# Altium PCB Main.PcbDoc
Units mm, origin at the board's own origin, x right, y up, seen from the top; angles counter-clockwise.
Board outline 152.4 x 101.6 mm, 2 copper layers (Top Layer, Bottom Layer); 41 components, 29 nets, 129 pads, 0 vias.
Unrouted connection lines stored in the file: 79.
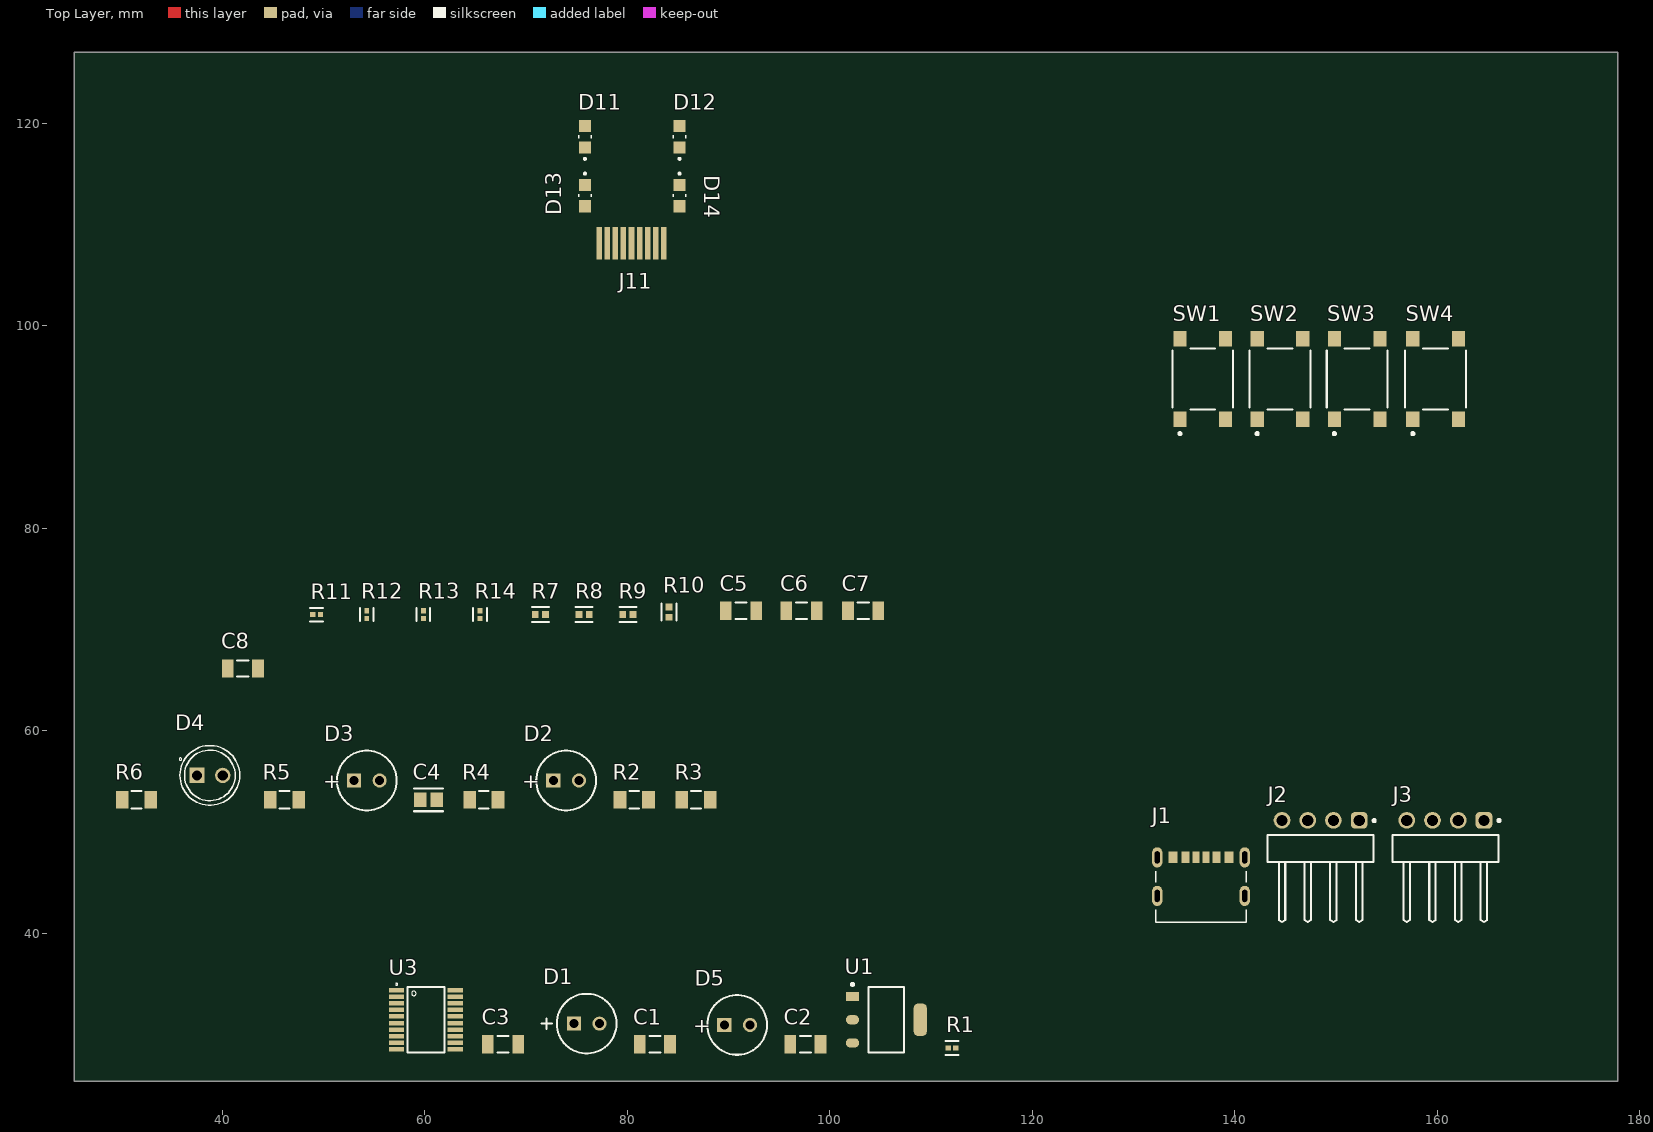
[diagram p0: Top Layer view]
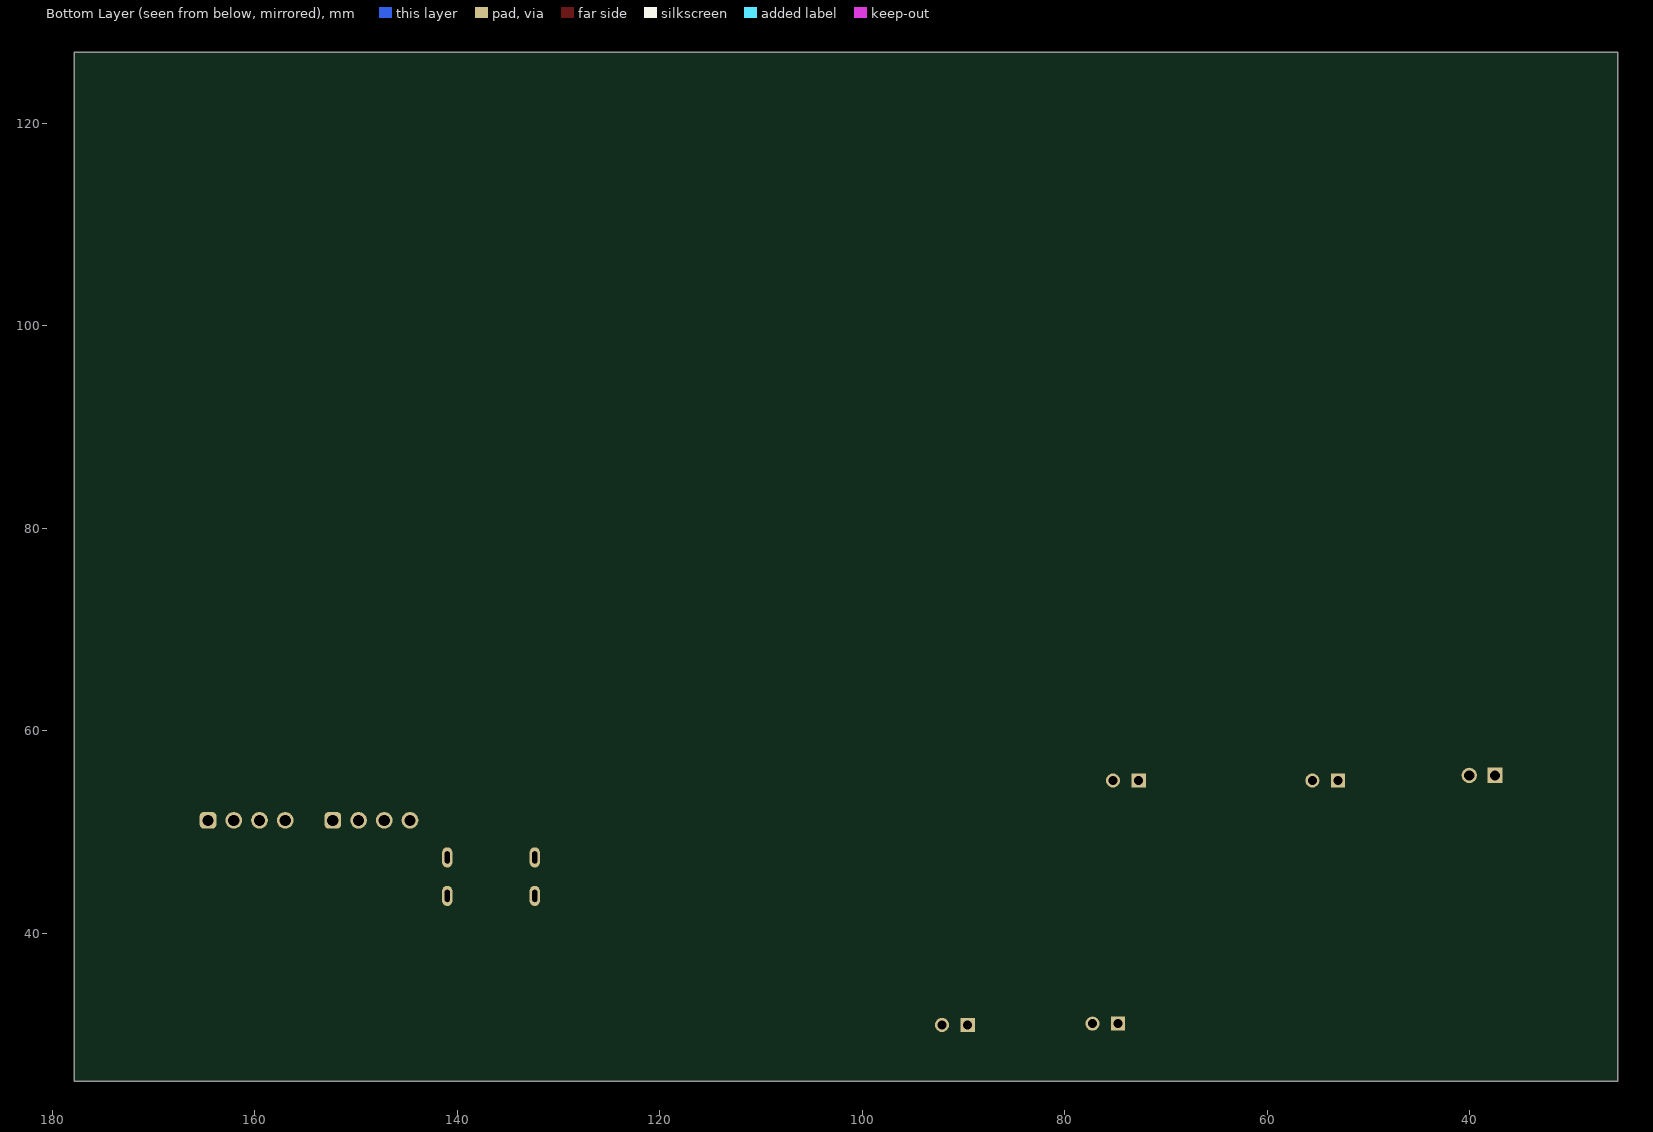
[diagram p1: Bottom Layer view, seen from below]

## Layer stack, top to bottom
Top Solder: solder mask 0.0102, Solder Resist, Dk 3.5
Top Layer: signal copper 0.0356
Dielectric 1: dielectric 0.32, FR-4, Dk 4.8
Bottom Layer: signal copper 0.0356
Bottom Solder: solder mask 0.0102, Solder Resist, Dk 3.5

## Board outline
25.4,25.4 177.8,25.4 177.8,127 25.4,127

## Design rules (kind name [scope] priority, off if disabled: settings)
Clearance [All] p1: gap=0.254 ignorepadtopadclearanceinfootprint=FALSE
PolygonConnect [All] p1: connectstyle=Relief reliefconductorwidth=0.254 reliefentries=4 polygonreliefangle="90 Angle" airgapwidth=0.254
RoomDefinition U2 [InComponentClass('U2')] p1: confinementstyle=ConfineIn formatcopy=TRUE lockcomponents=FALSE outline 73.99,105.986 87.071,105.986 87.071,120.98 73.99,120.98
RoutingVias [All] p1: holewidth=0.711 width=1.27 viastyle="Through Hole" minholewidth=0.711 minwidth=1.27 maxholewidth=0.711 maxwidth=1.27
SolderMaskExpansion [All] p1: expansion=0.102 istentingtop=FALSE
SupplyNets "Schematic Supply Nets_2" [InNet('GND')] p1: voltage=0.000
SupplyNets "Schematic Supply Nets_1" [InNet('+3.3')] p2: voltage=0.000
SupplyNets "Schematic Supply Nets" [InNet('+5')] p3: voltage=0.000
Width [All] p1: maxlimit=1 minlimit=0.254 preferedwidth=0.5
30 further rules are at their usual default settings.

## Classes and differential pairs
component class U2: D11 D12 "D13 " D14 J11
component class Main: C1 C2 C3 C4 C5 C6 C7 C8 D1 D2 D3 D4 D5 J1 J2 J3 R1 R2 R3 R4 R5 R6 R7 R8 R9 R10 R11 R12 R13 R14 SW1 SW2 SW3 SW4 U1 U3

## Components (designator, comment, footprint, x,y, rotation, side; value= is the part's Value field where it differs from the comment)
C1 "CAPACITOR_1206ZC104JAT2A" CAPC1206(3216)100_N 82.728,29.058 r0 top value=100nF
C2 "CAPACITOR_1206ZC104JAT2A" CAPC1206(3216)100_N 97.587,29.058 r0 top value=100nF
C3 "CAPACITOR_1206ZC104JAT2A" CAPC1206(3216)100_N 67.742,29.058 r0 top value=100nF
C4 "CL21F105ZAFNNNF" FP-CL21-IPC_B 60.376,53.188 r0 top value=1µF
C5 "CAPACITOR_1206ZC104JAT2A" CAPC1206(3216)100_N 91.237,71.857 r0 top value=100nF
C6 "CAPACITOR_1206ZC104JAT2A" CAPC1206(3216)100_N 97.206,71.857 r0 top value=100nF
C7 "CAPACITOR_1206ZC104JAT2A" CAPC1206(3216)100_N 103.302,71.857 r0 top value=100nF
C8 "CAPACITOR_1206ZC104JAT2A" CAPC1206(3216)100_N 42.037,66.167 r0 top value=100nF
D1 "Green" KING-WP7113SGD_V 75.997,31.09 r0 top
D2 "Red" KING-WP7113SRDD_V 73.965,55.093 r0 top
D3 "Yellow" KING-WP7113SYD_V 54.28,55.093 r0 top
D4 "Orange" LED_WP7113SEC 38.786,55.601 r0 top
D5 "PWR" KING-WP7113SRDD_V 90.856,30.963 r0 top
D11 "LED" LED_LTW-170TK 75.819,118.66 r90 top
D12 "LED" LED_LTW-170TK 85.166,118.66 r90 top
D13 "LED" LED_LTW-170TK 75.819,112.844 r270 top
D14 "LED" LED_LTW-170TK 85.166,112.844 r270 top
J1 "USB" CUI_UJC-HP-3-SMT-TR 136.652,47.498 r0 top
J2 "Program" 61300411021 148.463,48.387 r0 top
J3 "UART" 61300411021 160.782,48.387 r0 top
J11 "Module_for_Nokia_LCD_5110" PCBComponent_1 80.616,108.345 r180 top
R1 "RESISTOR__RC1005F102CS" FP-RC1005-IPC_C 112.065,28.677 r0 top value=1k
R2 "MCR18EZPF3300" FP-MCR18-IPC_B 80.696,53.188 r0 top value=330
R3 "MCR18EZPF3300" FP-MCR18-IPC_B 86.792,53.188 r0 top value=330
R4 "MCR18EZPF3300" FP-MCR18-IPC_B 65.837,53.188 r0 top value=330
R5 "MCR18EZPF3300" FP-MCR18-IPC_B 46.152,53.188 r0 top value=330
R6 "MCR18EZPF3300" FP-MCR18-IPC_B 31.547,53.188 r0 top value=330
R7 "TFCR0402-16W-C-1002BT" FP-TFCR0402-IPC_A 71.425,71.476 r0 top value=10k
R8 "TFCR0402-16W-C-1002BT" FP-TFCR0402-IPC_A 75.743,71.476 r0 top value=10k
R9 "TFCR0402-16W-C-1002BT" FP-TFCR0402-IPC_A 80.061,71.476 r0 top value=10k
R10 "TFCR0402-16W-C-1002BT" FP-TFCR0402-IPC_A 84.125,71.73 r90 top value=10k
R11 "RESISTOR__RC1005F102CS" FP-RC1005-IPC_C 49.327,71.476 r0 top value=1k
R12 "RESISTOR__RC1005F102CS" FP-RC1005-IPC_C 54.28,71.476 r90 top value=1k
R13 "RESISTOR__RC1005F102CS" FP-RC1005-IPC_C 59.868,71.476 r90 top value=1k
R14 "RESISTOR__RC1005F102CS" FP-RC1005-IPC_C 65.456,71.476 r90 top value=1k
SW1 "BUTTON1" FP-PTS645SM43SMTR92LFS-MFG 136.83,94.742 r90 top
SW2 "BUTTON2" FP-PTS645SM43SMTR92LFS-MFG 144.45,94.742 r90 top
SW3 "BUTTON3" FP-PTS645SM43SMTR92LFS-MFG 152.07,94.742 r90 top
SW4 "BUTTON4" FP-PTS645SM43SMTR92LFS-MFG 159.817,94.742 r90 top
U1 "AMS1117-3.3" FP-AMS1117-IPC_B 105.588,31.471 r0 top
U3 "STM8S103F3P6" SOP65P640X120-20N 60.122,31.471 r0 top

## Footprints (in the part's own frame and the unit in brackets; to place one, negate y for a bottom-side part, rotate by r counter-clockwise, add the part's x,y. Pads: shape width x height; smd on the part's side, far side on the other; paste and mask are expansions set on the pad)
61300411021 [mm] "Pin Header, pitch 2.54 mm, THT, Angled, single row, 4p"
  rrect50% 1.65x1.65 hole 1.1: 1(3.81,2.77)
  round 1.65 hole 1.1: 2(1.27,2.77) 3(-1.27,2.77) 4(-3.81,2.77)
  silkscreen extent -5.23,-7.27 5.42,2.87, body extent -5.08,-7.27 5.08,3.09, height 2.58
CAPC1206(3216)100_N [mm] "Chip Capacitor, Body 3.2x1.6mm, Height 1mm, IPC Medium Density"
  rect 1.15x1.8 smd: 1(-1.5,0) 2(1.5,0)
  silkscreen extent -0.55,-0.8 0.55,0.8, body extent -1.7,-0.9 1.7,0.9, height 1
CUI_UJC-HP-3-SMT-TR [mm]
  rect 0.7x1.15 smd: A5(-0.5,0.005) B5(0.5,0.005)
  rect 0.8x1.15 smd: A9(1.52,0.005) B9(-1.52,0.005)
  rect 0.9x1.15 smd: A12(2.75,0.005) B12(-2.75,0.005)
  oval 1x2 hole 0.5 slot 1.2 at 90 deg: S1(-4.32,0) S2(4.32,0) S3(-4.32,-3.8) S4(4.32,-3.8)
  silkscreen extent -4.47,-6.4 4.47,-1.35, body extent -4.47,-4.28 4.47,2.62, height 1.93
FP-AMS1117-IPC_B [mm]
  rect 1.304x0.912 smd paste+0 mask+0: 1(-3.345,2.29)
  rrect100% 1.304x0.912 smd paste+0 mask+0: 2(-3.345,0) 3(-3.345,-2.29)
  rrect70% 1.304x3.222 smd paste+0 mask+0: 4(3.345,0)
  silkscreen extent -3.47,-3.25 1.75,3.62, body extent -4.25,-3.5 4.25,3.5, height 0.25
FP-CL21-IPC_B [mm]
  rect 1.255x1.456 smd paste+0 mask+0: 1(-0.826,0) 2(0.826,0)
  silkscreen extent -1.45,-1.13 1.45,1.13, body extent -1.7,-0.98 1.7,0.98, height 0.25
FP-MCR18-IPC_B [mm]
  rect 1.256x1.758 smd paste+0 mask+0: 1(-1.401,0) 2(1.401,0)
  silkscreen extent -0.47,-0.88 0.47,0.88, body extent -2.28,-1.13 2.28,1.13, height 0.25
FP-PTS645SM43SMTR92LFS-MFG [mm]
  rect 1.55x1.3 smd paste+0 mask+0: 1(-3.975,2.25) 2(3.975,2.25) 3(-3.975,-2.25) 4(3.975,-2.25)
  silkscreen extent -5.52,-3 3,3, body extent -4.85,-3.1 4.85,3.1, height 0.25
FP-RC1005-IPC_C [mm]
  rect 0.515x0.472 smd paste+0 mask+0: 1(-0.379,0) 2(0.379,0)
  silkscreen extent -0.64,-0.67 0.64,0.67, body extent -0.74,-0.38 0.74,0.38, height 0.25
FP-TFCR0402-IPC_A [mm]
  rect 0.665x0.672 smd paste+0 mask+0: 1(-0.504,0) 2(0.504,0)
  silkscreen extent -0.84,-0.74 0.84,0.74, body extent -1.04,-0.54 1.04,0.54, height 0.25
KING-WP7113SGD_V [mm] "THD, 2-Leads, Dia 5.9mm, Body Length 8.6mm"
  rect 1.4x1.4 hole 0.889: 1(-1.27,0)
  round 1.4 hole 0.889: 2(1.27,0)
  silkscreen extent -4.47,-2.95 2.95,2.95, body extent -2.95,-2.95 2.5,2.95, height 15.5
KING-WP7113SRDD_V [mm] "THD, 2-Leads, Dia 5.9mm, Body Length 8.6mm"
  rect 1.4x1.4 hole 0.889: 1(-1.27,0)
  round 1.4 hole 0.889: 2(1.27,0)
  silkscreen extent -2.95,-2.95 2.95,2.95, body extent -2.95,-2.95 2.5,2.95, height 15.5
KING-WP7113SYD_V [mm] "THD, 2-Leads, Dia 5.9mm, Body Length 8.6mm"
  rect 1.4x1.4 hole 0.889: 1(-1.27,0)
  round 1.4 hole 0.889: 2(1.27,0)
  silkscreen extent -2.95,-2.95 2.95,2.95, body extent -2.95,-2.95 2.5,2.95, height 15.5
LED_LTW-170TK [mm]
  rect 1.2x1.2 smd: A(1.05,0) C(-1.05,0)
  silkscreen extent -2.27,-0.63 0.13,0.63
LED_WP7113SEC [mm]
  round 1.508 hole 1: A(1.27,0)
  rect 1.508x1.508 / inner round 1.508 / far side rect 1.508x1.508 hole 1: C(-1.27,0)
  silkscreen extent -3.03,-2.95 2.95,2.95, body extent -2.5,-2.95 2.95,2.95, height 9.6
PCBComponent_1 [mm]
  rect 0.55x3.2 smd: 1(-3,0.2) 2(-2.2,0.2) 3(-1.4,0.2) 4(-0.6,0.2) 5(0.2,0.2) 6(1,0.2) 7(1.8,0.2) 8(2.6,0.2) 9(3.4,0.2)
SOP65P640X120-20N [mm]
  rect 1.5x0.45 smd: 1(-2.9,2.925) 2(-2.9,2.275) 3(-2.9,1.625) 4(-2.9,0.975) 5(-2.9,0.325) 6(-2.9,-0.325) 7(-2.9,-0.975) 8(-2.9,-1.625) 9(-2.9,-2.275) 10(-2.9,-2.925) 11(2.9,-2.925) 12(2.9,-2.275) 13(2.9,-1.625) 14(2.9,-0.975) 15(2.9,-0.325) 16(2.9,0.325) 17(2.9,0.975) 18(2.9,1.625) 19(2.9,2.275) 20(2.9,2.925)
  silkscreen extent -3,-3.25 1.83,3.6, body extent -3.2,-3.25 3.2,3.25, height 0.53

## Part data
C1 C2 C3 C5 C6 C7 C8: library part CMP-001-00221-1, "Ceramic Capacitor, Multilayer, Ceramic, 10V, 5% +Tol, 5% -Tol, X7R, 15% TC, 0.1uF, Surface Mount, 1206", Capacitor Type=Ceramic, Case/Package=1206, Max Operating Temperature=125°C, Min Operating Temperature=-55°C, Package Shape=Rectangular, Package Style=SMTMeter, Rated DC Voltage (URdc)=10V, Temperature Characteristics Code=X7R, Tolerance  (fill in as +-)=5%, Dielectric Material=Ceramic, Height=0.94mm, JESD-609 Code=e3, Length=3.2mm, Mounting Technology="Surface Mount", Multilayer=Yes, Packaging="Tape and Reel", Pins=2, Reach SVHC Compliant=Yes, RoHS Compliant=Yes, Terminal Finish=Nickel, Termination=Wraparound, Tolerance (fill in as +-)=5%, Width=1.6mm
C4: library part CMP-001-00222-1, "Ceramic Capacitor, Multilayer, Ceramic, 25V, 80% +Tol, 20% -Tol, Y5V, -82/+22% TC, 1uF, Surface Mount, 0805", Capacitor Type=Ceramic, Case/Package=0805, Max Operating Temperature=85°C, Min Operating Temperature=-30°C, Package Shape=Rectangular, Package Style=SMTMeter, Rated DC Voltage (URdc)=25V, Temperature Characteristics Code=Y5V, Tolerance  (fill in as +-)=20%, Tolerance (fill in as +-)=80%, Dielectric Material=Ceramic, Height=1.35mm, JESD-609 Code=e3, Length=2mm, Mounting Technology="Surface Mount", Multilayer=Yes, Packaging="Tape and Reel", Pins=2, Reach SVHC Compliant=Yes, RoHS Compliant=Yes, Terminal Finish=Nickel, Termination=Wraparound, Width=1.25mm
D1: library part CMP-007-00010-2, "LED Green, 62.5 mW, 25 mA, -40 to 85 degC, 2-Pin THD, RoHS, Bulk", Case/Package=Radial, Forward Voltage=2.2V, Manufacturer=Kingbright, Package Description="2-Pin Through Hole Device, Dia 5.9 mm, Body Length 8.6 mm", Package Quantity=1000, Package Reference=WP7113SGD, Power=62.5mW, Colour=Green, Datasheet URL=http://www.kingbrightusa.com/images/catalog/SPEC/WP7113SGD.pdf, Datasheet Version="Rev. 6B, 01/2015", Illumination Colour=Green, Lens Style=Dome, Luminous Intensity=40mcd, Mounting Technology=TH, Nominal Vf=2.2V, Packaging=Bulk, RoHS Compliant=True, Viewing Angle=30degrees
D2: library part CMP-007-00033-2, "The Super Bright Red Source Color Device, 1.85 V, -40 to 85 degC, 2-Pin THD, RoHS, Tape and Reel", Case/Package=Radial, Forward Voltage=1.85V, Manufacturer=Kingbright, Package Description="2-Pin Through Hole Device, Dia 5.9 mm, Body Length 8.6 mm", Package Quantity=500, Package Reference=WP7113SRDD, Colour=Red, Datasheet URL=http://www.kingbrightusa.com/images/catalog/SPEC/WP7113SRD-D.pdf, Datasheet Version="Rev. 6A, 07/2016", Illumination Colour=Red, Lens Style=Diffused, Luminous Intensity=300mcd, Mounting Technology=TH, Nominal Vf=1.85V, Packaging=Bulk, RoHS Compliant=True, Viewing Angle=30degrees
D3: library part CMP-007-00034-2, "The Super Bright Yellow Source Color Device, 2 V, -40 to 85 degC, 2-Pin THD, RoHS, Tape and Reel", Case/Package=Radial, Forward Current=20mA, Forward Voltage=2V, Manufacturer=Kingbright, Package Description="2-Pin Through Hole Device, Dia 5.9 mm, Body Length 8.6 mm", Package Quantity=500, Package Reference=WP7113SYD, Colour=Yellow, Datasheet URL=http://www.kingbrightusa.com/images/catalog/SPEC/WP7113SYD.pdf, Datasheet Version="Rev. 7B, 01/2015", Illumination Colour=Yellow, Lens Style=Diffused, Luminous Intensity=600mcd, Mounting Technology=TH, Nominal Vf=2V, Packaging=Bulk, RoHS Compliant=True, Viewing Angle=30degrees
D4: library part CMP-004-00038-1, "LED Thru-Hole Orange T1-3/4 5mm Clear Lens 30mA 610nm 2500mcd Round", Case/Package="Radial Kingbright", Check_prices=https://www.snapeda.com/parts/WP7113SEC/Kingbright/view-part/?ref=eda, Component Type=Standard, Design Item ID=WP7113SEC, MF=Kingbright, MP=WP7113SEC, Pins=2, SnapEDA_Link=https://www.snapeda.com/parts/WP7113SEC/Kingbright/view-part/?ref=snap, Source=WP7113SEC.SchLib
D5: library part CMP-007-00033-2, "The Super Bright Red Source Color Device, 1.85 V, -40 to 85 degC, 2-Pin THD, RoHS, Tape and Reel", Case/Package=Radial, Colour=Red, Forward Voltage=1.85V, Manufacturer=Kingbright, Package Description="2-Pin Through Hole Device, Dia 5.9 mm, Body Length 8.6 mm", Package Quantity=500, Package Reference=WP7113SRDD, Datasheet URL=http://www.kingbrightusa.com/images/catalog/SPEC/WP7113SRD-D.pdf, Datasheet Version="Rev. 6A, 07/2016", Illumination Colour=Red, Lens Style=Diffused, Luminous Intensity=300mcd, Mounting Technology=TH, Nominal Vf=1.85V, Packaging=Bulk, RoHS Compliant=True, Viewing Angle=30degrees
D11 D12 D13 D14: library part CMP-004-00039-1, "White - LED Indication - Discrete 3.3V 0805 (2012 Metric)", Case/Package="0805 Lite-On", Check_prices=https://www.snapeda.com/parts/LTW-170TK/Lite-On/view-part/?ref=eda, Component Type=Standard, Design Item ID=LTW-170TK, MF="Lite-On Inc.", MP=LTW-170TK, Pins=2, SnapEDA_Link=https://www.snapeda.com/parts/LTW-170TK/Lite-On/view-part/?ref=snap, Source=LTW-170TK.SchLib
J1: library part CMP-074-000000-1, Package=None, Availability=Unavailable, Component Type=Standard, Design Item ID=UJC-HP-3-SMT-TR, MP=UJC-HP-3-SMT-TR, Pin Count=10, Price=None, Source=UJC-HP-3-SMT-TR.SchLib
J2 J3: library part CMP-043-000000-1, Color=Black, Contact Resistance=20m?, Current Rating=3A, Operating Supply Voltage=250V, Component Type=Standard, Connector Type="Male Pin", Contact Material=Copper, Contact Mating Length=5.9944mm, Contact Plating=Gold, Design Item ID=CMP-1502-01063-3, Gender=Male, Lead Pitch=2.54mm, Mount="Through Hole", NexarPartId=31153320, Number of Contacts=4, Number of Pins=4, Number of Positions=4, Number of Rows=1, Pin Count=4, Pitch=2.54mm, REACH SVHC=Unknown, RoHS=Compliant, Source="Components - 25.08.25 - 11.48.SchLib", Termination=Solder
R1: library part CMP-009-00419-1, "Fixed Resistor, Metal Glaze/thick Film, 0.06W, 1000ohm, 50V, 1% +/-Tol, 100ppm/Cel, Surface Mount, 0402", Case/Package=0402, Max Operating Temperature=125°C, Min Operating Temperature=-55°C, Package Height=0.35mm, Package Length=1mm, Package Shape=Rectangular, Package Width=0.5mm, Power=60mW, Resistor Type="FIXED RESISTOR", Temperature Coefficient (ppm/Cel)=100, Tolerance=1%, Working Voltage=50V, Construction=Chip, JESD-609 Code=e3, Mounting Technology="Surface Mount", Packaging="Tape and Reel", Pins=2, Reach SVHC Compliant=Yes, RoHS Compliant=Yes, Technology="METAL GLAZE/THICK FILM", Terminal Finish=Nickel
R2 R3 R4 R5 R6: library part CMP-009-00420-1, "Fixed Resistor, Metal Glaze/thick Film, 0.25W, 330ohm, 200V, 1% +/-Tol, 100ppm/Cel, Surface Mount, 1206", Case/Package=1206, Max Operating Temperature=155°C, Min Operating Temperature=-55°C, Package Height=0.55mm, Package Length=3.2mm, Package Shape=Rectangular, Package Width=1.6mm, Power=250mW, Rated Temperature=70°C, Resistor Type="FIXED RESISTOR", Temperature Coefficient (ppm/Cel)=100, Tolerance=1%, Working Voltage=200V, Construction=Rectangular, JESD-609 Code=e3, Mounting Technology="Surface Mount", Packaging="Tape and Reel", Pins=2, Reach SVHC Compliant=Yes, Reference Standard="TS 16949", RoHS Compliant=Yes, Technology="METAL GLAZE/THICK FILM", Terminal Finish=Nickel, Termination=Wraparound
R7 R8 R9 R10: library part CMP-009-00435-1, "Fixed Resistor, Thin Film, 0.063W, 10000ohm, 25V, 0.1% +/-Tol, 50ppm/Cel, Surface Mount, 0402", Case/Package=0402, Max Operating Temperature=155°C, Min Operating Temperature=-55°C, Power Dissipation=63mW, Temperature Coefficient=50ppm/°C, Tolerance=0.1%, Voltage Rating=25V, China RoHS=Compliant, Composition="Thin Film", Height=300µm, Lifecycle Status=Production, Mounting Technology="Surface Mount", Number of Terminals=2, Power Rating=63mW, REACH SVHC=Yes, RoHS=Compliant, Width=500µm, Working Voltage=25V
R11 R12 R13 R14: library part CMP-009-00449-1, "Res Thin Film 0603 47K Ohm 0.1% 0.063W(1/16W) ±25ppm/C Pad SMD T/R Medical", Case/Package=0402, Max Operating Temperature=125°C, Min Operating Temperature=-55°C, Package Height=0.35mm, Package Length=1mm, Package Shape=Rectangular, Package Width=0.5mm, Power=60mW, Resistor Type="FIXED RESISTOR", Temperature Coefficient (ppm/Cel)=100, Tolerance=1%, Working Voltage=50V, Construction=Chip, JESD-609 Code=e3, Mounting Technology="Surface Mount", Packaging="Tape and Reel", Pins=2, Reach SVHC Compliant=Yes, RoHS Compliant=Yes, Technology="METAL GLAZE/THICK FILM", Terminal Finish=Nickel
SW1 SW2 SW3 SW4: library part CMP-00012-1, "Keypad Switch, 1 Switches, SPST, Momentary-tactile, 0.05A, 12VDC, 1.57N, 4 PCB Hole Cnt, Solder Terminal, Surface Mount-straight", Contact Current(DC)-Max=50mA, Contact DC Max Rating R Load=0.05A@12VDC, Contact Resistance=0.1mR, Contact Voltage(DC)-Max=12V, Dielectric Withstand Volts=250VACV, Insulation Resistance=100GR, Max Operating Temperature=60°C, Min Operating Temperature=-20°C, Actuator Type=Pushbutton, Body Breadth=5.9944mm, Body Height=3.4544mm, Body Length or Diameter=5.9944mm, JESD-609 Code=e4, Mounting Technology="Surface Mount", PCB Hole Count=4, Reach SVHC Compliant=Yes, RoHS Compliant=Yes, Switch Action=MOMENTARY, Switch Function=SPST, Switch Type=Keypad, Terminal Finish=Silver, Terminal Length=0.138inch, Termination=Solder
U1: library part CMP-012-00000-1, "Fixed Positive LDO Regulator, 3.3V, 1.3V Dropout, PDSO3", Case/Package=SOP, Dropout Voltage1-Max=1.3V, Operating Temperature, TJ-Max=125°C, Operating Temperature, TJ-Min=-40°C, Output Current1-Max=1A, Output Voltage1-Max=3.399V, Output Voltage1-Min=3.201V, Output Voltage1-Nom=3.3V, Package Body Material=Plastic, Package Shape=Rectangular, Package Style="SMALL OUTLINEMeter", Channels=1, Height - Seated (Max)=1.8mm, JESD-30 Code=R-PDSO-G3, Length=6.505mm, Pins=3, Reach SVHC Compliant=Yes, Regulator Type="FIXED POSITIVE SINGLE OUTPUT LDO REGULATOR", RoHS Compliant=Yes, Surface Mount=Yes, Terminal Form="Gull Wing", Terminal Pitch=2.29mm, Terminal Position=DUAL, Width=3.505mm
U3: library part CMP-031-00014-1, "STM8 series Microcontroller IC 8-Bit 16MHz 8KB (8K x 8) FLASH 20-TSSOP", Case/Package="TSSOP-20 STMicroelectronics", Check_prices=https://www.snapeda.com/parts/STM8S103F3P6/STMicroelectronics/view-part/?ref=eda, Component Type=Standard, Design Item ID=STM8S103F3P6, MF=STMicroelectronics, MP=STM8S103F3P6, Pins=20, SnapEDA_Link=https://www.snapeda.com/parts/STM8S103F3P6/STMicroelectronics/view-part/?ref=snap, Source=STM8S103F3P6.SchLib

## Nets (pads, with @x,y where several pads share a name; then routed paths per layer and width w, separated by ;. In a path a pad name is that pad's centre, name@x,y a point inside that pad or via, vN(x,y) a via of type N, cw(c..) or ccw(c..) an arc to the next point about the centre after c; other vN are vias at no path point)
+3.3: C2.2 C3.1 J2.1 J3.1 J11.4 J11.9 R1.1 R2.2 R7.1 R8.1 R9.1 R10.1 U1.2 U3.9
+5: C1.2 J1.A9 U1.3
A1: C5.1 R7.2 R11.1 U3.5
A2: C6.1 R8.2 R12.1 U3.6
B5: C8.1 R10.2 R14.1 U3.11
C4: R5.1 U3.14
C7: R6.1 U3.17
D2: R4.1 U3.19
D3: R3.1 U3.20
D4: C7.1 R9.2 R13.1 U3.1
D/C: J11.6 U3.13
DN<MOSI>: J11.7 U3.16
GND: C1.1 C2.1 C3.2 C4.2 C5.2 C6.2 C7.2 C8.2 D1.2 D2.2 D3.2 D4.C D5.2 D11.C D12.C D13.C D14.C J1.B12 J1.S1 J2.3 J3.4 J11.3 SW1.2 SW2.2 SW3.2 SW4.2 U1.1 U3.7
NetC4_1: C4.1 U3.8
NetD1_1: D1.1 R3.2
NetD2_1: D2.1 R4.2
NetD5_1: D5.1 R1.2
NetD11_A: D11.A D12.A D13.A D14.A R2.1
NetR11_2: R11.2 SW1.3
NetR12_2: R12.2 SW2.3
NetR13_2: R13.2 SW3.3
NetR14_2: R14.2 SW4.3
NRST: J2.4 U3.4
RST: J11.1 U3.12
RX: J3.2 U3.3
SCE: J11.5 U3.10
SCLK: J11.8 U3.15
SWIM: J2.2 U3.18
TX: J3.3 U3.2
pads on no net: D3.1 D4.A J1.A5 J1.A12 J1.B5 J1.B9 J1.S2 J1.S3 J1.S4 J11.2 R5.2 R6.2 SW1.1 SW1.4 SW2.1 SW2.4 SW3.1 SW3.4 SW4.1 SW4.4 U1.4

## Text inside footprints (layer, text, board x,y; h text height)
D2: Top Overlay "+" at 69.647,54.331 h1.5
D3: Top Overlay "+" at 49.962,54.331 h1.5
D5: Top Overlay "+" at 86.538,30.201 h1.5